# EAGLE board diff-neg-VCO-100kzh-12Mhz-alc (EAGLE 5.10)
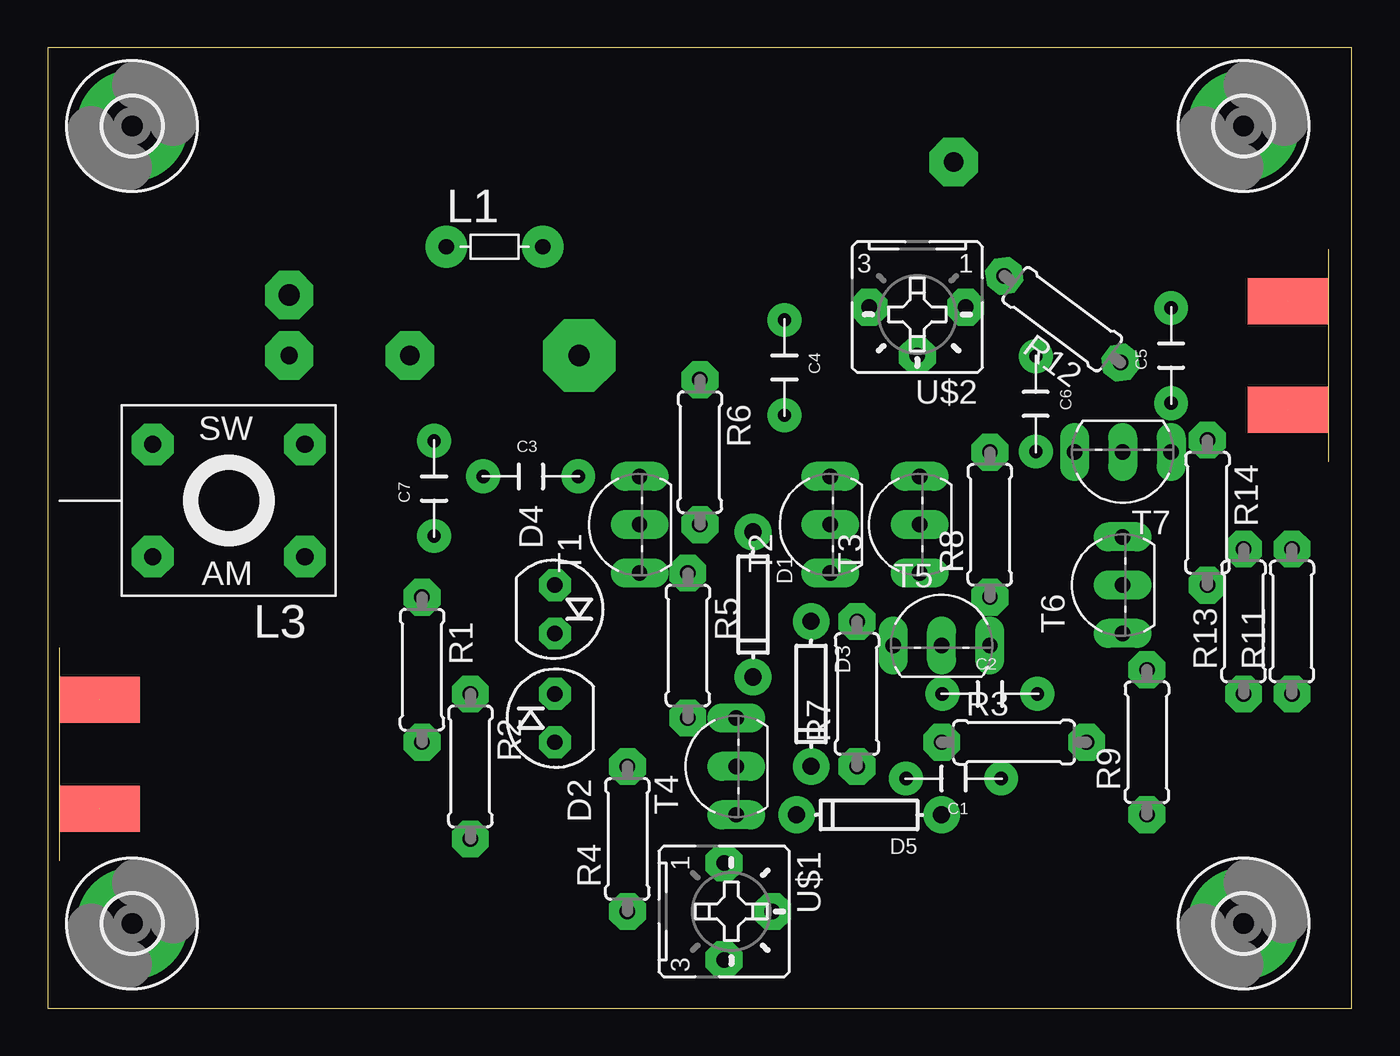
[diagram p0: board, top side]
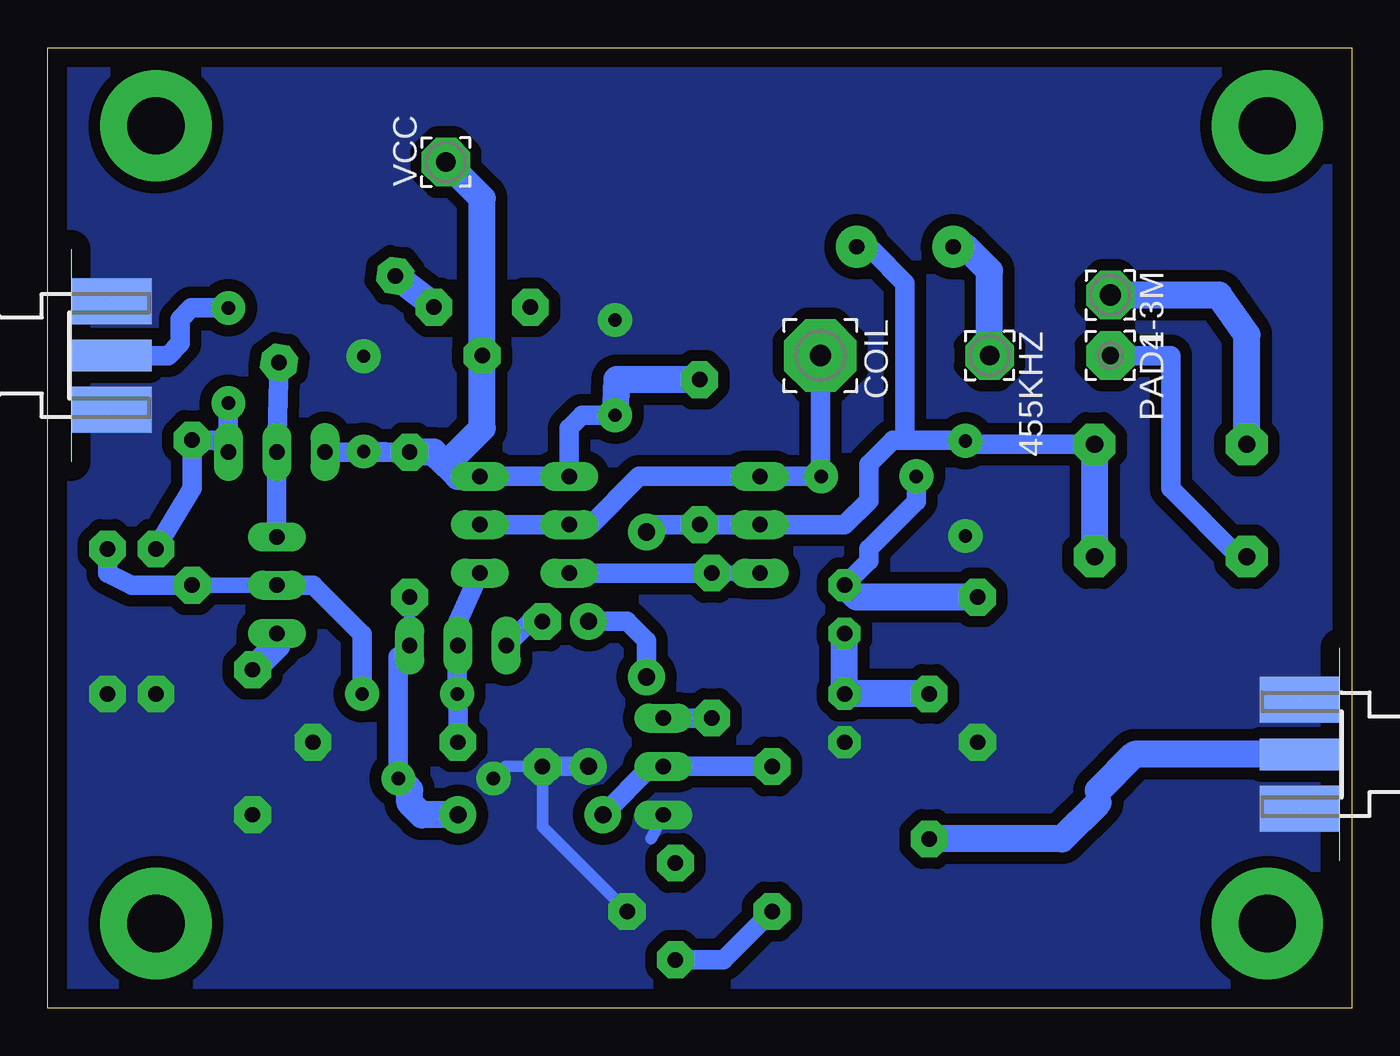
[diagram p1: board, bottom side, seen from below]

Size 68.56 x 50.47 mm. Coordinates in mm from the lower left corner, seen from the top.
Outline: 0,0 68.56,0 68.56,50.47 0,50.47 0,0
Copper layers (1*16): Top 0.035mm / dielectric 1.5mm / Bottom 0.035mm
Design rules "default": minimum track width 10mil, minimum drill 24mil, track to track 8mil, track to pad 8mil, pad to pad 8mil, via to via 8mil, smd to smd 8mil, copper to edge 40mil, drill to drill 8mil, minimum pad ring 10mil, minimum via ring 8mil, stop-mask expansion 4mil, vias tented up to drill 0mil, thermal gap 10mil

## Footprints (pad centres in the part's own frame; a part is rotated, then mirrored left to right if it is on the bottom)
2,54/1,1 = drill 1.118 pad 2.54 octagon: 1 0,0
2,54/1,0 = drill 1.016 pad 2.54 octagon: 1 0,0
CAP-PTH-5MM = drill 0.7 pad 1.778 round: 1 -2.5,0; 2 2.5,0
3,81/1,1 = drill 1.118 pad 3.81 octagon: 1 0,0
DIODE-1N4148 = drill 0.9 pad 1.93 round: A -3.81,0; C 3.81,0
SOT54H@1 = drill 0.813 pad 1.676 octagon: A 1.27,0; C -1.27,0
3,0-PAD = drill 3 pad 5.842 round: B3,0 0,0
L-5 = drill 0.813 pad 2.184 round: 1 -2.54,0; 2 2.54,0
AM-SM-COIL = drill 0.9 pad 2.184 octagon: AM1 -2.95,4; AM2 -2.95,-4; SW1 2.95,4; SW2 2.95,-4
2,54/0,9 = drill 0.914 pad 2.54 octagon: 1 0,0
0207/7 = drill 0.813 pad 1.93 octagon: 1 -3.81,0; 2 3.81,0
TO92-EBC = drill 0.813 pad 1.524 long: B 0,-1.27; C 2.54,-1.27; E -2.54,-1.27
B25P = drill 0.813 pad 1.93 octagon: A -2.54,0; E 2.54,0; S 0,2.54
SMA-KE = smd 4.191 x 1.651: 1 2.115,0 | smd 4.191 x 2.413: G@1 2.115,2.86; G@2 2.115,-2.86 | smd 4.191 x 2.413 bottom: G@3 2.115,2.86; G@4 2.115,-2.86

## Placement (x,y rotation side)
1-3M  [2,54/1,1]  12.7,37.47 270 bottom
455KHZ  [2,54/1,0]  19.05,34.29 270 bottom
C1  100n  [CAP-PTH-5MM]  47.62,12.06 180 top
C2  100n  [CAP-PTH-5MM]  49.53,16.51 0 top
C3  682  [CAP-PTH-5MM]  25.4,27.94 0 top
C4  104  [CAP-PTH-5MM]  38.73,33.66 270 top
C5  100n  [CAP-PTH-5MM]  59.05,34.29 90 top
C6  104  [CAP-PTH-5MM]  51.94,31.75 270 top
C7  104  [CAP-PTH-5MM]  20.32,27.3 90 top
COIL  [3,81/1,1]  27.94,34.29 270 bottom
D1  [DIODE-1N4148]  37.08,21.21 270 top
D2  1sv149  [SOT54H@1]  26.67,15.24 270 top
D3  [DIODE-1N4148]  40.13,16.51 270 top
D4  1sv149  [SOT54H@1]  26.67,20.95 90 top
D5  [DIODE-1N4148]  43.18,10.16 180 top
H1  MOUNT-PAD-ROUND3.0  [3,0-PAD]  4.45,4.45 0 top
H2  MOUNT-PAD-ROUND3.0  [3,0-PAD]  4.45,46.35 0 top
H3  MOUNT-PAD-ROUND3.0  [3,0-PAD]  62.87,46.35 0 top
H4  MOUNT-PAD-ROUND3.0  [3,0-PAD]  62.87,4.45 0 top
L1  [L-5]  23.5,40.01 0 top
L3  [AM-SM-COIL]  9.53,26.67 90 top
PAD4  [2,54/0,9]  12.7,34.29 270 bottom
R1  51k  [0207/7]  19.68,17.78 270 top
R2  51k  [0207/7]  22.23,12.7 270 top
R3  560R  [0207/7]  50.8,13.97 0 top
R4  220R  [0207/7]  30.48,8.89 90 top
R5  2.2k  [0207/7]  33.66,19.05 270 top
R6  4.7k  [0207/7]  34.29,29.21 270 top
R7  10r  [0207/7]  42.55,16.51 90 top
R8  2.7k  [0207/7]  49.53,25.4 90 top
R9  220R  [0207/7]  57.78,13.97 90 top
R11  12k  [0207/7]  65.41,20.32 90 top
R12  1.2k  [0207/7]  53.34,36.2 143.2 top
R13  270R  [0207/7]  62.87,20.32 90 top
R14  47k  [0207/7]  60.96,26.04 270 top
T1  2sc9014  [TO92-EBC]  29.84,25.4 90 top
T2  2sc9014  [TO92-EBC]  39.88,25.4 90 top
T3  2sc9014  [TO92-EBC]  44.58,25.4 90 top
T4  2sc9014  [TO92-EBC]  34.92,12.7 90 top
T5  2sc9014  [TO92-EBC]  46.99,20.32 0 top
T6  2sc9014  [TO92-EBC]  55.24,22.23 90 top
T7  2sc9014  [TO92-EBC]  56.52,27.94 180 top
U$1  1k  [B25P]  35.56,5.08 270 top
U$2  1k  [B25P]  45.72,36.83 180 top
VCC  [2,54/1,0]  47.62,44.45 90 bottom
X1  SMA--KE  [SMA-KE]  67.31,34.29 0 bottom
X2  Sweep IN  [SMA-KE]  0.64,13.34 180 bottom

## Library data of the parts
1-3M 455KHZ COIL PAD4 VCC = wirepad
C1-C7 D1 D3 D5 R1-R9 R11-R14 T1-T7 U$1 U$2 = digital-toy
D2 D4 L1 L3 X1 X2 = dtoy-RF
H1-H4 = holes

## Nets
GND: C1.2 C4.1 C6.1 C7.1 D2.A D3.C R1.2 R3.2 R7.1 R9.1 R11.1 R13.1 T4.E U$1.S X1.G@1 X1.G@2 X1.G@3 X1.G@4 X2.G@1 X2.G@2 X2.G@3 X2.G@4
N$1: C3.1 D4.A R1.1
N$2: R9.2 T6.E
N$3: R5.1 T1.E T2.E
N$4: D1.C D3.A
N$5: D2.C D4.C R2.1
N$6: C2.2 R11.2 R14.2 T6.B
N$7: C3.2 COIL.1 T1.C T2.B T3.B
N$8: R2.2 X2.1
N$9: R5.2 T4.C
N$10: C2.1 R3.1 T3.E T5.B
N$11: D5.C R4.2 T4.B
N$12: R4.1 U$1.E
N$13: R7.2 T5.E
N$14: C1.1 D5.A R8.1 T5.C
N$15: C5.2 X1.1
N$16: R12.1 T6.C T7.B
N$17: R12.2 U$2.A
N$18: C5.1 R13.2 R14.1 T7.E
N$19: C7.2 D1.A L1.2 L3.AM2 L3.SW2 R6.2 T1.B
N$21: 1-3M.1 L3.SW1
N$22: L3.AM1 PAD4.1
N$23: 455KHZ.1 L1.1
VCC: C4.2 C6.2 R6.1 R8.2 T2.C T3.C T7.C U$2.S VCC.1

## Tracks (layer width: path | path; a pad name or v marks a point on that pad's centre or on a via)
GND  (4 unrouted)
  Bottom 0.61: 36.83,8.89 T4.E | U$1.S 42.55,9.53 R7.1 44.49,12.7 C1.2
  Bottom 1.016: R7.1 D3.C
  pour Bottom (isolate 0.61, rank 6, no thermals): -4.45,55.24 69.85,55.24 80.64,38.73 80.64,13.34 64.77,-10.79 -1.27,-10.79 -13.97,4.45 -13.97,45.72
N$1
  Bottom 1.016: C3.1 22.9,26.63 25.4,24.13 25.4,23.5 D4.A
  Bottom 1.422: R1.1 26.04,21.59 D4.A
N$2
  Bottom 1.422: T6.E 56.52,19.05 R9.2
N$3
  Bottom 0.813: T1.E R5.1
  Bottom 1.016: R5.1 T2.E
N$4
  Bottom 1.016: D1.C 37.08,19.3 38.1,20.32 D3.A
N$5
  Bottom 1.422: D4.C D2.C R2.1
N$6
  Bottom 0.813: T6.B R14.2
  Bottom 1.016: R14.2 64.14,22.23 65.41,22.86 R11.2 | C2.2 52.03,19.64 54.61,22.23 T6.B
N$7
  Bottom 0.813: C3.2 27.94,27.98
  Bottom 1.016: C3.2 T1.C 37.47,27.94 40.01,25.4 T2.B T3.B | 27.94,27.98 COIL.1
N$8
  Bottom 1.016: 13.34,11.43 13.34,10.79
  Bottom 1.422: R2.2 15.24,8.89 13.34,10.79 | 13.34,11.43 11.43,13.34 X2.1
N$9
  Bottom 1.016: R5.2 T4.C
N$10
  Bottom 0.61: 46.99,16.47 C2.1 | 47.03,19.01 T5.B
  Bottom 1.016: T3.E 46.99,20.32 T5.B | R3.1 46.99,16.47 | C2.1 47.03,19.01
N$11
  Bottom 1.016: R4.2 T4.B 36.83,12.7 D5.C
N$12
  Bottom 1.016: R4.1 33.02,2.54 U$1.E
N$13
  Bottom 1.016: R7.2 43.18,20.32 T5.E
N$14
  Bottom 0.61: R8.1 T5.C 50.12,18.45
  Bottom 1.016: C1.1 50.12,18.45
  Bottom 1.422: D5.A 48.9,10.16 49.53,10.79 49.53,11.47 C1.1
N$15
  Bottom 1.016: C5.2 61,36.79 61.59,36.2 61.59,34.92 62.23,34.29 X1.1
N$16
  Bottom 1.016: T6.C T7.B R12.1
N$17
  Bottom 1.422: R12.2 48.64,37.21 U$2.A
N$18
  Bottom 1.016: R13.2 60.96,27.3 R14.1 59.69,29.84 T7.E C5.1
N$19
  Bottom 0.813: 20.36,29.84 C7.2 20.14,29.62 | 26.23,39.81 L1.2
  Bottom 1.016: 20.36,29.84 23.5,29.84 | 23.5,29.84 24.13,29.84 25.4,28.57 25.4,26.67 26.67,25.4 T1.B R6.2 36.7,25.4 D1.A | 26.23,39.81 25.21,39.81 23.5,38.1 23.5,29.84 | L3.SW2 20.14,29.62
  Bottom 1.422: L3.AM2 L3.SW2
N$21
  Bottom 1.422: L3.SW1 5.53,35.37 6.99,37.47 1-3M.1
N$22
  Bottom 1.016: L3.AM1 5.94,23.72 9.53,27.3 9.53,34.29 PAD4.1
N$23
  Bottom 1.422: 455KHZ.1 19.05,38.73 20.32,40.01 L1.1
VCC
  Bottom 0.61: C6.2 52.03,29.17
  Bottom 0.813: 52.03,29.17 R8.2
  Bottom 1.016: T3.C T2.C 41.15,30.48 40.47,31.16 C4.2 | 49.49,29.21 C6.2 | R8.2 T7.C
  Bottom 1.422: T3.C 46.99,27.94 47.62,28.57 | 47.62,28.57 48.26,29.21 49.49,29.21 | R6.1 38.65,33.02 C4.2 | VCC.1 45.72,42.55 U$2.S 45.72,30.48 47.62,28.57